# Altium PCB OPTO_board.PcbDoc
Units mil, origin at the board's own origin, x right, y up, seen from the top; angles counter-clockwise.
Board outline 4724.41 x 4330.71 mil, 2 copper layers (Top Layer, Bottom Layer), stack 62.205 mil thick; 92 components, 108 nets, 314 pads, 0 vias.
Unrouted connection lines stored in the file: 184.
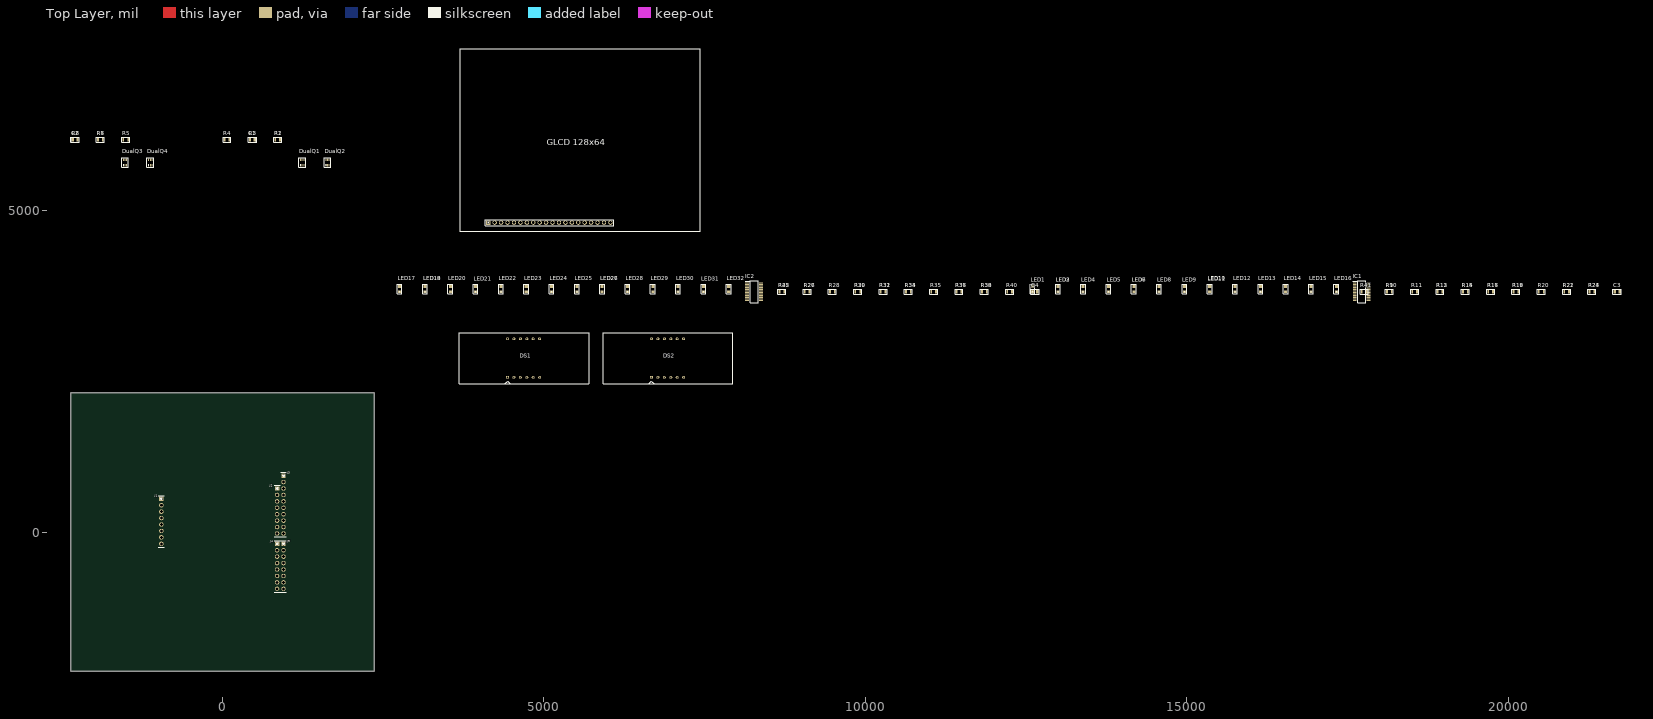
[diagram p0: Top Layer view]
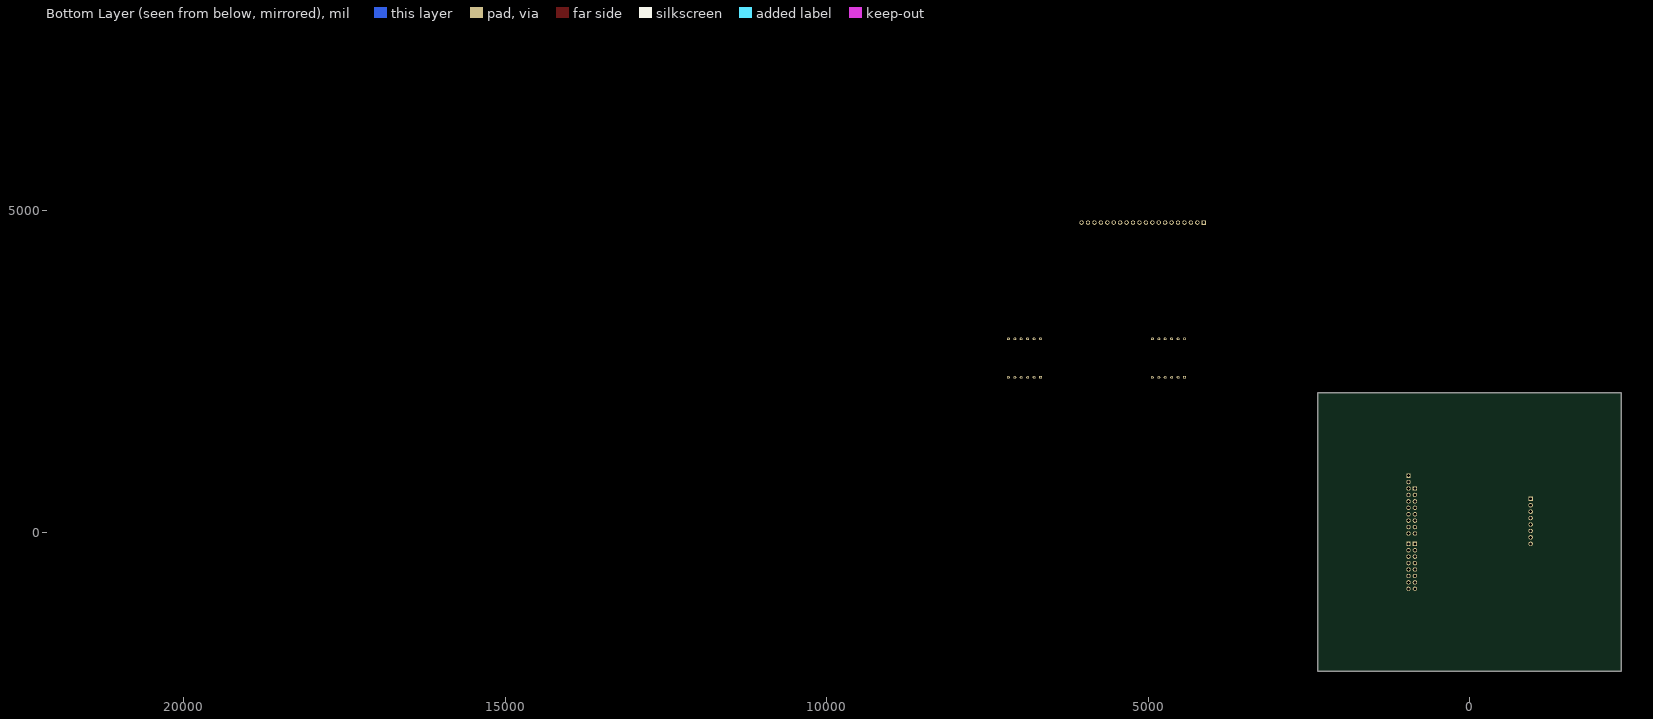
[diagram p1: Bottom Layer view, seen from below]

## Layer stack, top to bottom
Top Solder: solder mask 0.3937, Solder Resist, Dk 3.5
Top Layer: signal copper 1.4173
Dielectric 1: dielectric 59.3701, FR-4, Dk 4.8
Bottom Layer: signal copper 1.4173
Bottom Solder: solder mask 0.3937, Solder Resist, Dk 3.5

## Board outline
-2362.21,-2165.35 2362.2,-2165.35 2362.2,2165.35 -2362.21,2165.35

## Design rules (kind name [scope] priority, off if disabled: settings)
Clearance [All] p1: gap=10 ignorepadtopadclearanceinfootprint=FALSE except(0: Arc-Hole Track-Hole SMDPad-Hole THPad-THPad THPad-Hole Via-Hole Fill-Hole Poly-Hole Region-Hole Text-Hole)
ComponentClearance [All] p1: gap=0 collisioncheckmode=3 verticalgap=0 showdistances=FALSE
PolygonConnect [All] p1: connectstyle=Relief reliefconductorwidth=10 reliefentries=4 polygonreliefangle="90 Angle" airgapwidth=10
RoutingVias [All] p1: holewidth=28 width=50 viastyle="Through Hole" minholewidth=28 minwidth=50 maxholewidth=28 maxwidth=50
SolderMaskExpansion [All] p1: expansion=4 istentingtop=FALSE
Width [All] p1: maxlimit=10 minlimit=10 preferedwidth=10
29 further rules are at their usual default settings.

## Components (designator, comment, footprint, x,y, rotation, side; value= is the part's Value field where it differs from the comment)
C1 "Cap" "CAP 0805" 427.2,6102.36 r0 top value=100pF
C2 "Cap" "CAP 0805" -2328.71,6102.36 r0 top value=100pF
C3 "Cap" "CAP 0805" 21653.54,3740.16 r0 top value=100pF
C4 "Cap" "CAP 0805" 12598.42,3740.16 r0 top value=100pF
DS1 "5461BS" 5461BS 4433.17,2406.84 r90 top
DS2 "5461BS" 5461BS 6672.22,2406.84 r90 top
DualQ1 "MBT3906DW1T1G" MBT3906DW1T1G 1214.6,5708.66 r90 top
DualQ2 "MBT3906DW1T1G" MBT3906DW1T1G 1608.3,5708.66 r90 top
DualQ3 "MBT3906DW1T1G" MBT3906DW1T1G -1541.3,5708.66 r90 top
DualQ4 "MBT3906DW1T1G" MBT3906DW1T1G -1147.6,5708.66 r90 top
"GLCD 128x64" "GLCD" "LCD 128x64" 4133.72,4815.23 r0 top
IC1 "MAX7313AEG+" SOP64P602X175-24N 17716.53,3740.16 r0 top
IC2 "MAX7313AEG+" SOP64P602X175-24N 8267.72,3740.16 r0 top
J1 "Connector 1" "1X8 HEADER" -950,520 r270 top
J2 "Connector 2" "1X8 HEADER" 850,680 r270 top
J3 "Connector 3" "1X10 HEADER" 950,880 r270 top
J4 "Connector 4" "1X8 HEADER" 850,-180 r270 top
J5 "Connector 5" "1X8 HEADER" 950,-180 r270 top
LED1 "R-LED" "LED RED 0805" 12598.42,3740.16 r90 top
LED2 "R-LED" "LED RED 0805" 12992.13,3740.16 r90 top
LED3 "R-LED" "LED RED 0805" 12992.13,3740.16 r90 top
LED4 "R-LED" "LED RED 0805" 13385.83,3740.16 r90 top
LED5 "R-LED" "LED RED 0805" 13779.53,3740.16 r90 top
LED6 "R-LED" "LED RED 0805" 14173.23,3740.16 r90 top
LED7 "R-LED" "LED RED 0805" 14173.23,3740.16 r90 top
LED8 "R-LED" "LED RED 0805" 14566.93,3740.16 r90 top
LED9 "R-LED" "LED RED 0805" 14960.63,3740.16 r90 top
LED10 "R-LED" "LED RED 0805" 15354.33,3740.16 r90 top
LED11 "R-LED" "LED RED 0805" 15354.33,3740.16 r90 top
LED12 "R-LED" "LED RED 0805" 15748.03,3740.16 r90 top
LED13 "R-LED" "LED RED 0805" 16141.73,3740.16 r90 top
LED14 "R-LED" "LED RED 0805" 16535.43,3740.16 r90 top
LED15 "R-LED" "LED RED 0805" 16929.13,3740.16 r90 top
LED16 "R-LED" "LED RED 0805" 17322.83,3740.16 r90 top
LED17 "Y-LED" "LED YELLOW 0805" 2755.9,3740.16 r90 top
LED18 "Y-LED" "LED YELLOW 0805" 3149.61,3740.16 r90 top
LED19 "Y-LED" "LED YELLOW 0805" 3149.61,3740.16 r90 top
LED20 "Y-LED" "LED YELLOW 0805" 3543.31,3740.16 r90 top
LED21 "Y-LED" "LED YELLOW 0805" 3937.01,3740.16 r90 top
LED22 "Y-LED" "LED YELLOW 0805" 4330.71,3740.16 r90 top
LED23 "Y-LED" "LED YELLOW 0805" 4724.41,3740.16 r90 top
LED24 "Y-LED" "LED YELLOW 0805" 5118.11,3740.16 r90 top
LED25 "Y-LED" "LED YELLOW 0805" 5511.81,3740.16 r90 top
LED26 "Y-LED" "LED YELLOW 0805" 5905.51,3740.16 r90 top
LED27 "Y-LED" "LED YELLOW 0805" 5905.51,3740.16 r90 top
LED28 "Y-LED" "LED YELLOW 0805" 6299.21,3740.16 r90 top
LED29 "Y-LED" "LED YELLOW 0805" 6692.91,3740.16 r90 top
LED30 "Y-LED" "LED YELLOW 0805" 7086.61,3740.16 r90 top
LED31 "Y-LED" "LED YELLOW 0805" 7480.31,3740.16 r90 top
LED32 "Y-LED" "LED YELLOW 0805" 7874.01,3740.16 r90 top
R1 "Res" "RES 0805" 820.9,6102.36 r0 top value=2K
R2 "Res" "RES 0805" 820.9,6102.36 r0 top value=2K
R3 "Res" "RES 0805" 427.2,6102.36 r0 top value=2K
R4 "Res" "RES 0805" 33.5,6102.36 r0 top value=2K
R5 "Res" "RES 0805" -1541.3,6102.36 r0 top value=2K
R6 "Res" "RES 0805" -1935.01,6102.36 r0 top value=2K
R7 "Res" "RES 0805" -1935.01,6102.36 r0 top value=2K
R8 "Res" "RES 0805" -2328.71,6102.36 r0 top value=2K
R9 "Res" "RES 0805" 18110.24,3740.16 r0 top value=65
R10 "Res" "RES 0805" 18110.24,3740.16 r0 top value=65
R11 "Res" "RES 0805" 18503.94,3740.16 r0 top value=65
R12 "Res" "RES 0805" 18897.64,3740.16 r0 top value=65
R13 "Res" "RES 0805" 18897.64,3740.16 r0 top value=65
R14 "Res" "RES 0805" 19291.34,3740.16 r0 top value=65
R15 "Res" "RES 0805" 19291.34,3740.16 r0 top value=65
R16 "Res" "RES 0805" 19685.04,3740.16 r0 top value=65
R17 "Res" "RES 0805" 19685.04,3740.16 r0 top value=65
R18 "Res" "RES 0805" 20078.74,3740.16 r0 top value=65
R19 "Res" "RES 0805" 20078.74,3740.16 r0 top value=65
R20 "Res" "RES 0805" 20472.44,3740.16 r0 top value=65
R21 "Res" "RES 0805" 20866.14,3740.16 r0 top value=65
R22 "Res" "RES 0805" 20866.14,3740.16 r0 top value=65
R23 "Res" "RES 0805" 21259.84,3740.16 r0 top value=65
R24 "Res" "RES 0805" 21259.84,3740.16 r0 top value=65
R25 "Res" "RES 0805" 8661.42,3740.16 r0 top value=65
R26 "Res" "RES 0805" 9055.12,3740.16 r0 top value=65
R27 "Res" "RES 0805" 9055.12,3740.16 r0 top value=65
R28 "Res" "RES 0805" 9448.82,3740.16 r0 top value=65
R29 "Res" "RES 0805" 9842.52,3740.16 r0 top value=65
R30 "Res" "RES 0805" 9842.52,3740.16 r0 top value=65
R31 "Res" "RES 0805" 10236.22,3740.16 r0 top value=65
R32 "Res" "RES 0805" 10236.22,3740.16 r0 top value=65
R33 "Res" "RES 0805" 10629.92,3740.16 r0 top value=65
R34 "Res" "RES 0805" 10629.92,3740.16 r0 top value=65
R35 "Res" "RES 0805" 11023.62,3740.16 r0 top value=65
R36 "Res" "RES 0805" 11417.32,3740.16 r0 top value=65
R37 "Res" "RES 0805" 11417.32,3740.16 r0 top value=65
R38 "Res" "RES 0805" 11811.02,3740.16 r0 top value=65
R39 "Res" "RES 0805" 11811.02,3740.16 r0 top value=65
R40 "Res" "RES 0805" 12204.72,3740.16 r0 top value=65
R41 "Res" "RES 0805" 17716.53,3740.16 r0 top value=2K
R42 "Res" "RES 0805" 8661.42,3740.16 r0 top value=2K

## Footprints (in the part's own frame and the unit in brackets; to place one, negate y for a bottom-side part, rotate by r counter-clockwise, add the part's x,y. Pads: shape width x height; smd on the part's side, far side on the other; paste and mask are expansions set on the pad)
"1X8 HEADER" [mm]
  rect 1.725x1.725 hole 1.15: 1(0,0)
  round 1.725 hole 1.15: 2(2.54,0) 3(5.08,0) 4(7.62,0) 5(10.16,0) 6(12.7,0) 7(15.24,0) 8(17.78,0)
  silkscreen extent -1.3,-1.17 19.08,1.17, body extent -1.27,-1.2 19.05,1.21, height 3.3
"1X10 HEADER" [mm]
  rect 1.725x1.725 hole 1.15: 1(0,0)
  round 1.725 hole 1.15: 2(2.54,0) 3(5.08,0) 4(7.62,0) 5(10.16,0) 6(12.7,0) 7(15.24,0) 8(17.78,0) 9(20.32,0) 10(22.86,0)
  silkscreen extent -1.3,-1.17 24.16,1.17, body extent -1.27,-1.2 24.13,1.21, height 3.3
5461BS [mm] "7 Segments Display"
  rect 1x1.2 hole 0.6: 1(0,0)
  oval 1x1.2 hole 0.6: 2(0,-2.54) 3(0,-5.08) 4(0,-7.62) 5(0,-10.16) 6(0,-12.7) 7(15.24,-12.7) 8(15.24,-10.16) 9(15.24,-7.62) 10(15.24,-5.08) 11(15.24,-2.54) 12(15.24,0)
  silkscreen extent -2.5,-32.2 17.7,19, body extent -1.9,-31.75 17.1,18.55, height 8.01
"CAP 0805" [mm]
  rect 0.9x1.3 smd: 1(0,0) 2(1.9,0)
  silkscreen extent -0.75,-0.97 2.63,0.97, body extent -0.05,-0.62 1.95,0.63, height 1.01
"LCD 128x64" [mm] "GLCD"
  rect 1.725x1.725 hole 1.15: 1(0,0)
  round 1.725 hole 1.15: 2(2.54,0) 3(5.08,0) 4(7.62,0) 5(10.16,0) 6(12.7,0) 7(15.24,0) 8(17.78,0) 9(20.32,0) 10(22.86,0) 11(25.4,0) 12(27.94,0) 13(30.48,0) 14(33.02,0) 15(35.56,0) 16(38.1,0) 17(40.64,0) 18(43.18,0) 19(45.72,0) 20(48.26,0)
  silkscreen extent -11.25,-3.5 83.75,68.75, body extent -10.25,-2.36 82.75,67.64, height 13.42
"LED RED 0805" [mm]
  rect 1.1x1.2 smd: A(0,0) K(2.1,0)
  silkscreen extent -0.87,-0.92 2.98,0.92, body extent 0,-0.67 2.1,0.68, height 0.81
"LED YELLOW 0805" [mm]
  rect 1.1x1.2 smd: A(0,0) K(2.1,0)
  silkscreen extent -0.87,-0.92 2.98,0.92, body extent 0,-0.68 2.1,0.67, height 0.81
MBT3906DW1T1G [mm] "SOT65P210X110-6N"
  rect 0.95x0.4 smd: 1(0,0) 2(0,-0.65) 3(0,-1.3) 4(2.2,-1.3) 5(2.2,-0.65) 6(2.2,0)
  silkscreen extent -0.75,-2 2.95,0.7, body extent 0.05,-1.65 2.15,0.35, height 1.1
"RES 0805" [mm]
  rect 0.7x1.3 smd: 1(0,0) 2(1.9,0)
  silkscreen extent -0.63,-0.98 2.52,0.97, body extent -0.2,-0.68 2.1,0.68, height 0.77
SOP64P602X175-24N [mm]
  rect 1.55x0.435 smd: 1(-2.725,3.492) 2(-2.725,2.858) 3(-2.725,2.222) 4(-2.725,1.588) 5(-2.725,0.952) 6(-2.725,0.318) 7(-2.725,-0.318) 8(-2.725,-0.952) 9(-2.725,-1.588) 10(-2.725,-2.222) 11(-2.725,-2.858) 12(-2.725,-3.492) 13(2.725,-3.492) 14(2.725,-2.858) 15(2.725,-2.222) 16(2.725,-1.588) 17(2.725,-0.952) 18(2.725,-0.318) 19(2.725,0.318) 20(2.725,0.952) 21(2.725,1.588) 22(2.725,2.222) 23(2.725,2.858) 24(2.725,3.492)
  silkscreen extent -3.5,-4.33 1.6,4.33, body extent -3.01,-4.33 3.01,4.33, height 1.75

## Part data
C1 C2 C3 C4: "Capacitor", LatestRevisionDate=17-Jul-2002, LatestRevisionNote="Re-released for DXP Platform.", PackageDescription="Radial Cap, Thru-Hole; 2 Leads; 0.3 in Pin Spacing", PackageReference=RAD-0.3, Published=8-Jun-2000, Publisher="Altium Limited"
DS1 DS2: "4 Digit Display (Red)", Colour="High Efficiency Red (HER)", ComponentLink1Description="Manufacturer Link", ComponentLink1URL=http://www.agilent.com/, DatasheetVersion=19-Feb-2002, LatestRevisionDate=17-Dec-2003, LatestRevisionNote="Schematic revised, PCB Footprint replaced.", MinimumIntensity="360 ucd", Note="Pins 1 and 6 are redundant Anodes.", PackageDescription="LED, 7-Segment Display, 7.62 mm, RHD; 10 Leads; Row Space 5.08 mm; Pitch 2.54 mm", PackageReference=A, PackageVersion=11-Feb-2002, Published=8-Jun-2000, Publisher="Altium Limited"
DualQ1 DualQ2 DualQ3 DualQ4: "Dual Transistors", Manufacturer_Name="ON Semiconductor", Mouser Part Number=863-MBT3906DW1T1G, RS Part Number=7916075P, Datasheet Link=http://www.onsemi.com/pub/Collateral/MBT3906DW1T1-D.PDF, Height=1.1mm, Manufacturer_Part_Number=MBT3906DW1T1G, Mouser Price/Stock=https://www.mouser.com/Search/Refine.aspx?Keyword=863-MBT3906DW1T1G, Name=MBT3906DW1T1G, RS Price/Stock=http://uk.rs-online.com/web/p/products/7916075P
"GLCD 128x64": "Graphic LCD 128x64"
IC1 IC2: "GPIO Port Expander", Manufacturer_Name="Maxim Integrated", Mouser Part Number=700-MAX7313AEG, RS Part Number=1900494P, Datasheet Link=http://datasheets.maximintegrated.com/en/ds/MAX7313.pdf, Height=1.75mm, Manufacturer_Part_Number=MAX7313AEG+, Mouser Price/Stock=https://www.mouser.co.uk/ProductDetail/Maxim-Integrated/MAX7313AEG%2b?qs=LHmEVA8xxfbu9TMdrEq27g%3D%3D, RS Price/Stock=http://uk.rs-online.com/web/p/products/1900494P
J1 J2 J4 J5: "1x8 Header", Manufacturer_Name=Amphenol, Manufacturer_Part_Number=10129378-908001BLF, Mouser Part Number=649-1012937890801BLF, Datasheet Link=https://cdn.amphenol-icc.com/media/wysiwyg/files/drawing/10129378.pdf, Height=8.58mm, Mouser Price/Stock=https://www.mouser.com/Search/Refine.aspx?Keyword=649-1012937890801BLF
J3: "1x10 Header", Manufacturer_Name=Amphenol, Manufacturer_Part_Number=10129378-908001BLF, Mouser Part Number=649-1012937890801BLF, Datasheet Link=https://cdn.amphenol-icc.com/media/wysiwyg/files/drawing/10129378.pdf, Height=8.58mm, Mouser Price/Stock=https://www.mouser.com/Search/Refine.aspx?Keyword=649-1012937890801BLF
LED1 LED2 LED3 LED4 LED5 LED6 LED7 LED8 LED9 LED10 LED11 LED12 LED13 LED14 LED15 LED16: "Red LED", LatestRevisionDate=08-Jul-2005, LatestRevisionNote="Mech Layer 1 removed.", PackageDescription="LED; 2 Leads", PackageReference=LED-0, Published=8-Jun-2000, Publisher="Altium Limited"
LED17 LED18 LED19 LED20 LED21 LED22 LED23 LED24 LED25 LED26 LED27 LED28 LED29 LED30 LED31 LED32: "Yellow LED", LatestRevisionDate=08-Jul-2005, LatestRevisionNote="Mech Layer 1 removed.", PackageDescription="LED; 2 Leads", PackageReference=LED-0, Published=8-Jun-2000, Publisher="Altium Limited"
R1 R2 R3 R4 R5 R6 R7 R8 R9 R10 R11 R12 R13 R14 R15 R16 R17 R18 R19 R20 R21 R22 R23 R24 R25 R26 R27 R28 R29 R30 R31 R32 R33 R34 R35 R36 R37 R38 R39 R40 R41 R42: "Resistor", LatestRevisionDate=17-Jul-2002, LatestRevisionNote="Re-released for DXP Platform.", PackageDescription="Axial Device, Thru-Hole; 2 Leads; 0.3 in Pin Spacing", PackageReference=AXIAL-0.3, Published=8-Jun-2000, Publisher="Altium Limited"

## Nets (pads, with @x,y where several pads share a name; then routed paths per layer and width w, separated by ;. In a path a pad name is that pad's centre, name@x,y a point inside that pad or via, vN(x,y) a via of type N, cw(c..) or ccw(c..) an arc to the next point about the centre after c; other vN are vias at no path point)
+3V3: "GLCD 128x64.2" "GLCD 128x64.3" "GLCD 128x64.15" "GLCD 128x64.19" C1.2 C2.2 C3.2 C4.2 DualQ1.1 DualQ1.4 DualQ2.1 DualQ2.4 DualQ3.1 DualQ3.4 DualQ4.1 DualQ4.4 IC1.24 IC2.24 J1.4 R9.1 R10.1 R11.1 R12.1 R13.1 R14.1 R15.1 R16.1 R17.1 R18.1 R19.1 R20.1 R21.1 R22.1 R23.1 R24.1 R25.1 R26.1 R27.1 R28.1 R29.1 R30.1 R31.1 R32.1 R33.1 R34.1 R35.1 R36.1 R37.1 R38.1 R39.1 R40.1
GND: "GLCD 128x64.1" "GLCD 128x64.20" C1.1 C2.1 C3.1 C4.1 IC1.2 IC1.3 IC1.12 IC1.21 IC2.2 IC2.3 IC2.12 IC2.21 J1.6 J1.7
INT1: J3.5 R41.1
INT2: J3.6 R42.1
IO0: DualQ1.5 J5.8 R1.1 R1.2
IO1: DualQ1.2 J5.7 R2.1 R2.2
IO2: DualQ3.5 J5.6 R5.1 R5.2
IO3: DualQ3.2 J5.5 R6.1 R6.2
IO4: DS1.11 DS2.11 J5.4
IO5: DS1.7 DS2.7 J5.3
IO6: DS1.4 DS2.4 J5.2
IO7: DS1.2 DS2.2 J5.1
IO8: "GLCD 128x64.6" J3.10
IO9: "GLCD 128x64.5" J3.9
IO10: "GLCD 128x64.4" J3.8
IO26: DualQ2.5 J4.8 R3.1 R3.2
IO27: DualQ2.2 J4.7 R4.1 R4.2
IO28: DualQ4.5 J4.6 R7.1 R7.2
IO29: DualQ4.2 J4.5 R8.1 R8.2
IO30: DS1.1 DS2.1 J4.4
IO31: DS1.10 DS2.10 J4.3
IO32: DS1.5 DS2.5 J4.2
IO33: DS1.3 DS2.3 J4.1
IO34: "GLCD 128x64.14" J2.8
IO35: "GLCD 128x64.13" J2.7
IO36: "GLCD 128x64.12" J2.6
IO37: "GLCD 128x64.11" J2.5
IO38: "GLCD 128x64.10" J2.4
IO39: "GLCD 128x64.9" J2.3
IO40: "GLCD 128x64.8" J2.2
IO41: "GLCD 128x64.7" J2.1
LED1: IC1.11 LED1.K
LED2: IC1.10 LED2.K
LED3: IC1.9 LED3.K
LED4: IC1.8 LED4.K
LED5: IC1.7 LED5.K
LED6: IC1.6 LED6.K
LED7: IC1.5 LED7.K
LED8: IC1.4 LED8.K
LED9: IC1.20 LED9.K
LED10: IC1.19 LED10.K
LED11: IC1.18 LED11.K
LED12: IC1.17 LED12.K
LED13: IC1.16 LED13.K
LED14: IC1.15 LED14.K
LED15: IC1.14 LED15.K
LED16: IC1.13 LED16.K
LED17: IC2.11 LED17.K
LED18: IC2.10 LED18.K
LED19: IC2.9 LED19.K
LED20: IC2.8 LED20.K
LED21: IC2.7 LED21.K
LED22: IC2.6 LED22.K
LED23: IC2.5 LED23.K
LED24: IC2.4 LED24.K
LED25: IC2.20 LED25.K
LED26: IC2.19 LED26.K
LED27: IC2.18 LED27.K
LED28: IC2.17 LED28.K
LED29: IC2.16 LED29.K
LED30: IC2.15 LED30.K
LED31: IC2.14 LED31.K
LED32: IC2.13 LED32.K
NetDS1_6: DS1.6 DualQ2.6
NetDS1_8: DS1.8 DualQ2.3
NetDS1_9: DS1.9 DualQ1.6
NetDS1_12: DS1.12 DualQ1.3
NetDS2_6: DS2.6 DualQ4.6
NetDS2_8: DS2.8 DualQ4.3
NetDS2_9: DS2.9 DualQ3.6
NetDS2_12: DS2.12 DualQ3.3
NetIC1_1: IC1.1 R41.2
NetIC2_1: IC2.1 R42.2
NetLED1_A: LED1.A R9.2
NetLED2_A: LED2.A R10.2
NetLED3_A: LED3.A R11.2
NetLED4_A: LED4.A R12.2
NetLED5_A: LED5.A R13.2
NetLED6_A: LED6.A R14.2
NetLED7_A: LED7.A R15.2
NetLED8_A: LED8.A R16.2
NetLED9_A: LED9.A R17.2
NetLED10_A: LED10.A R18.2
NetLED11_A: LED11.A R19.2
NetLED12_A: LED12.A R20.2
NetLED13_A: LED13.A R21.2
NetLED14_A: LED14.A R22.2
NetLED15_A: LED15.A R23.2
NetLED16_A: LED16.A R24.2
NetLED17_A: LED17.A R25.2
NetLED18_A: LED18.A R26.2
NetLED19_A: LED19.A R27.2
NetLED20_A: LED20.A R28.2
NetLED21_A: LED21.A R29.2
NetLED22_A: LED22.A R30.2
NetLED23_A: LED23.A R31.2
NetLED24_A: LED24.A R32.2
NetLED25_A: LED25.A R33.2
NetLED26_A: LED26.A R34.2
NetLED27_A: LED27.A R35.2
NetLED28_A: LED28.A R36.2
NetLED29_A: LED29.A R37.2
NetLED30_A: LED30.A R38.2
NetLED31_A: LED31.A R39.2
NetLED32_A: LED32.A R40.2
RST: "GLCD 128x64.17" J1.3
SCL: IC1.22 IC2.22 J3.1
SDA: IC1.23 IC2.23 J3.2
pads on no net: "GLCD 128x64.16" "GLCD 128x64.18" J1.1 J1.2 J1.5 J1.8 J3.3 J3.4 J3.7